# Altium PCB PCB1.PcbDoc
Units mm, origin at the board's own origin, x right, y up, seen from the top; angles counter-clockwise.
Board outline 70 x 50 mm, 4 copper layers (Top Layer, Layer 2, Layer 3, Bottom Layer), stack 1.537 mm thick; 71 components, 52 nets, 290 pads, 108 vias.
Unrouted connection lines stored in the file: 19.
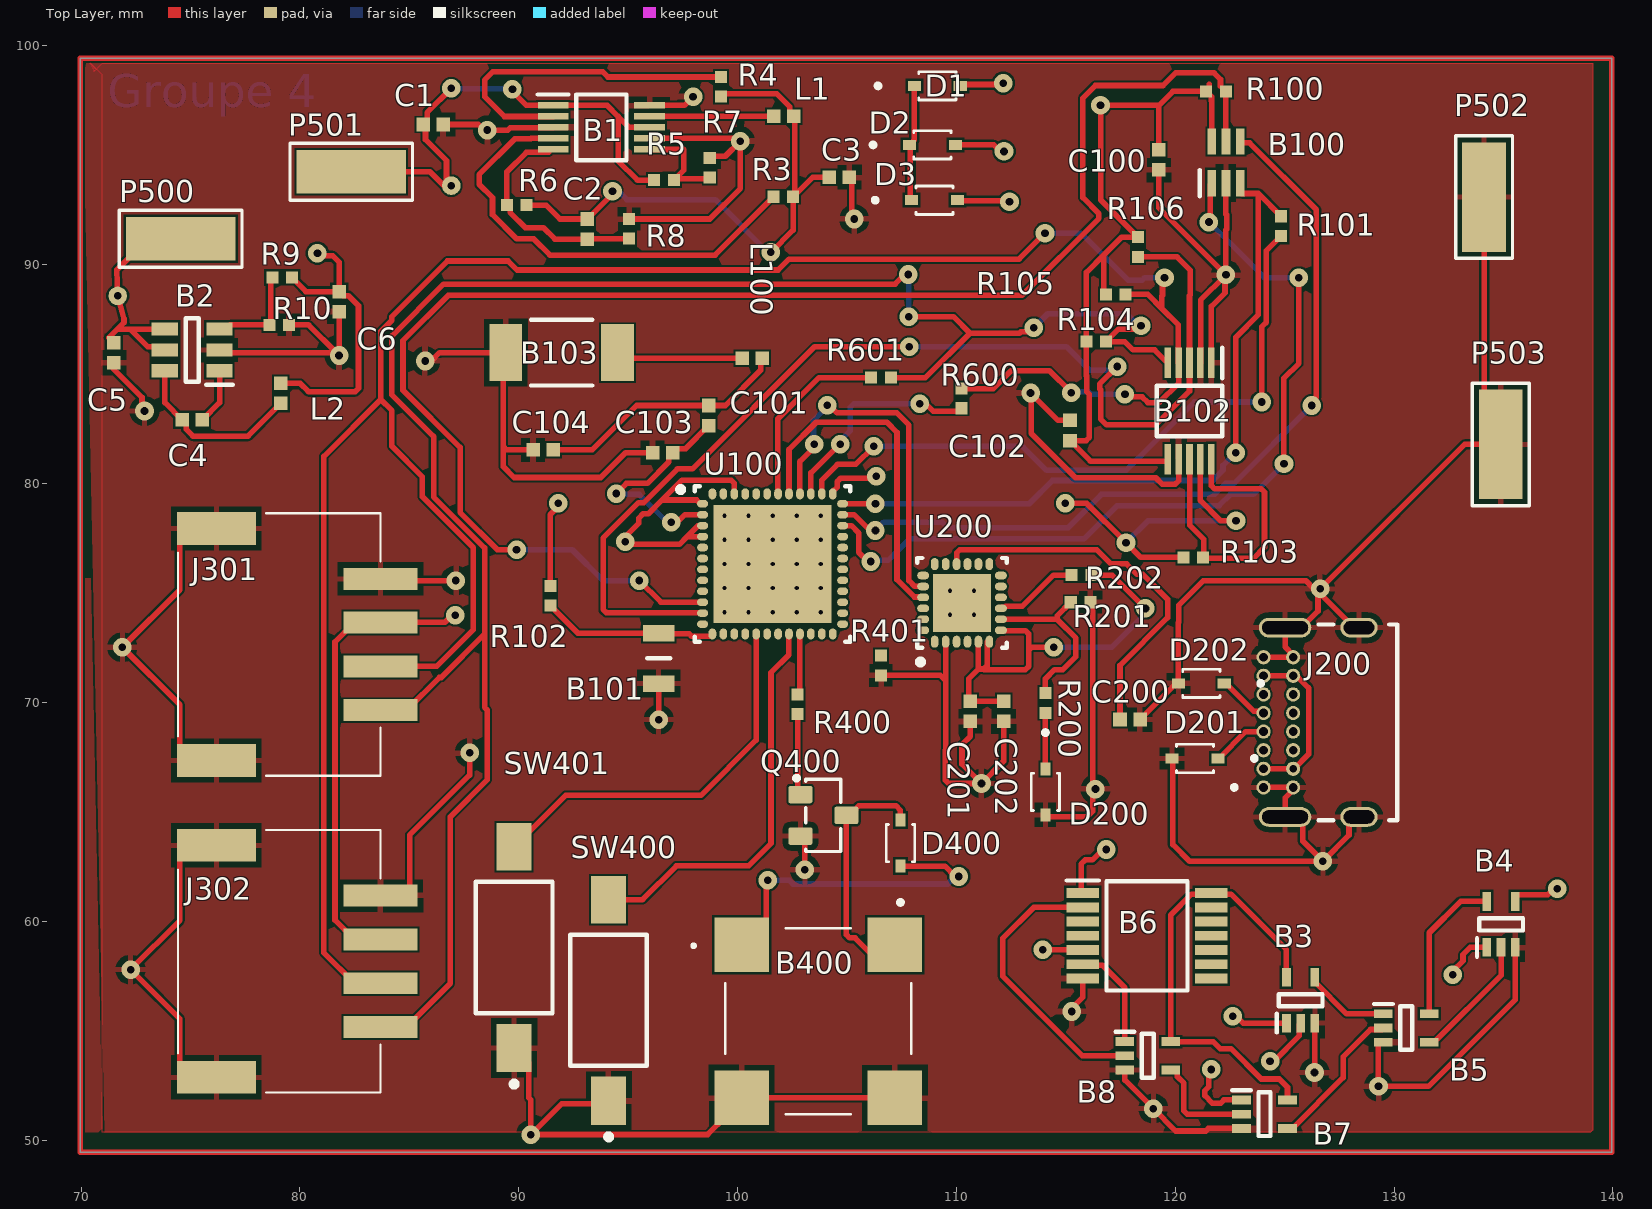
[diagram p0: Top Layer view]
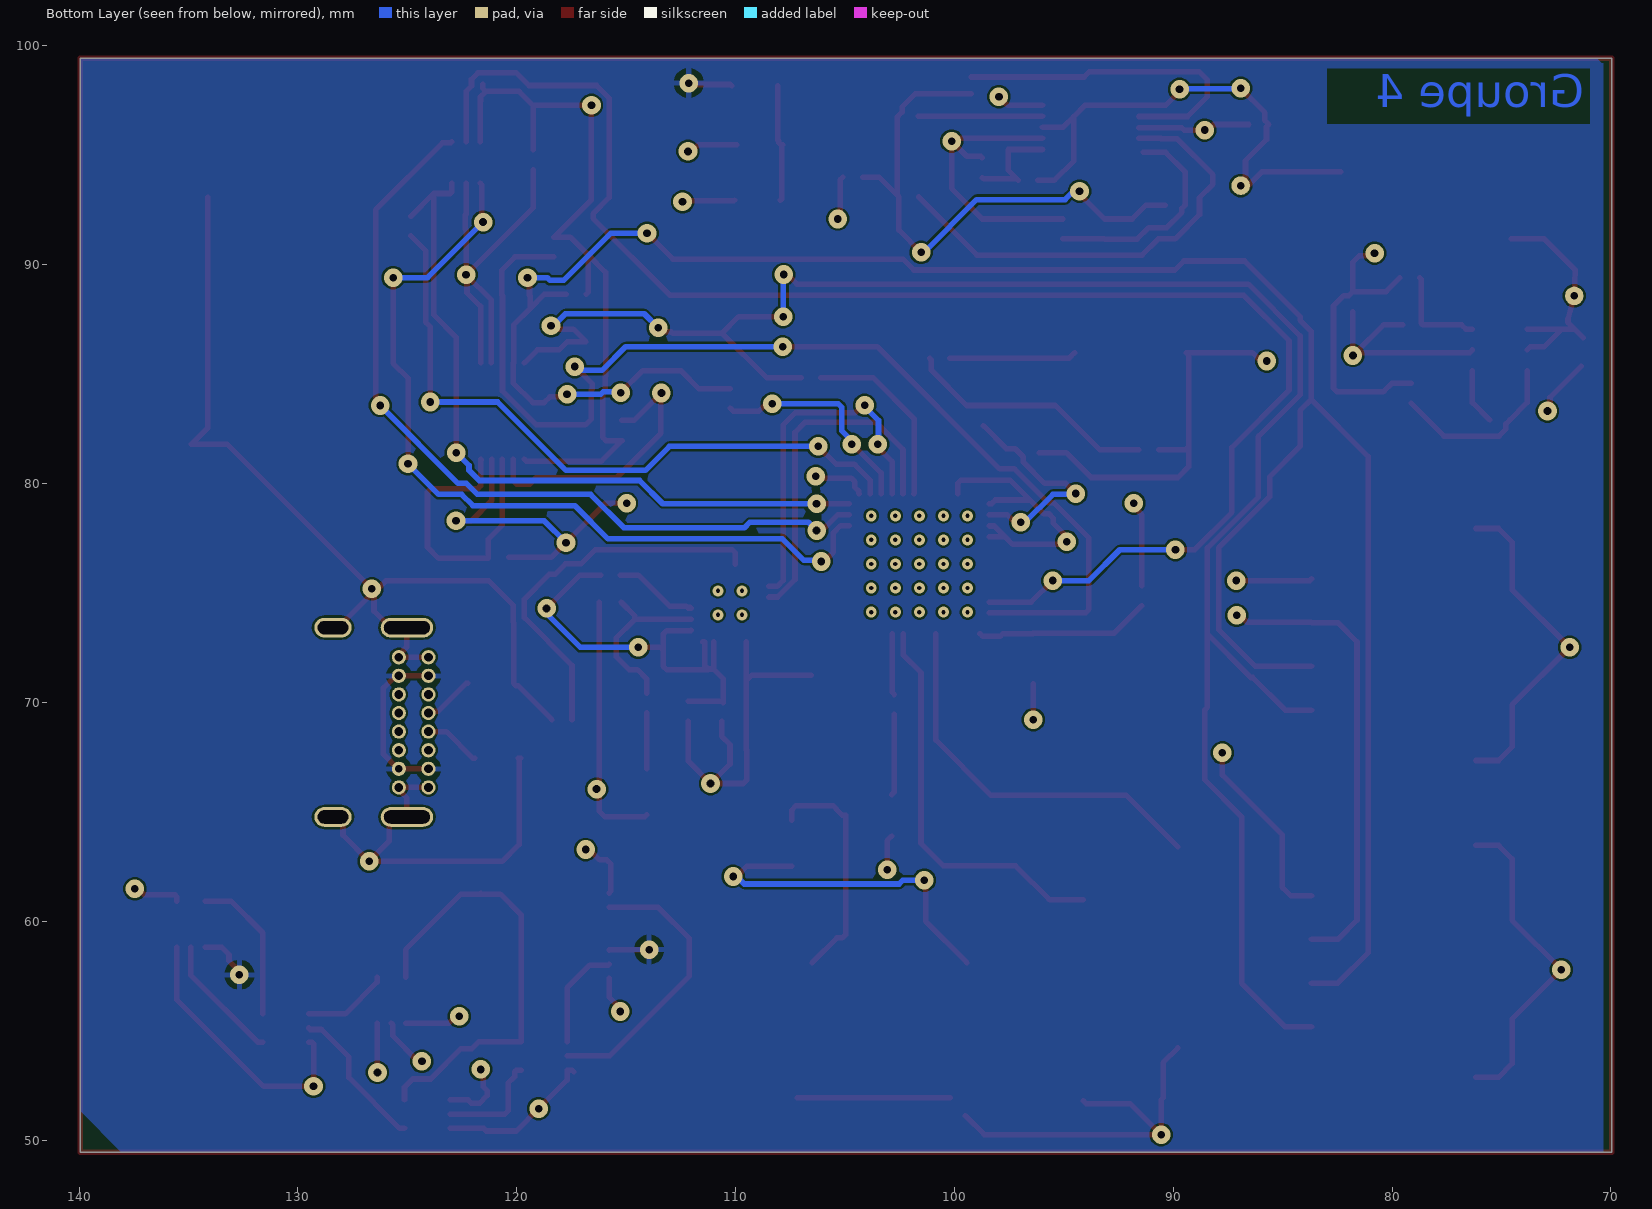
[diagram p1: Bottom Layer view, seen from below]
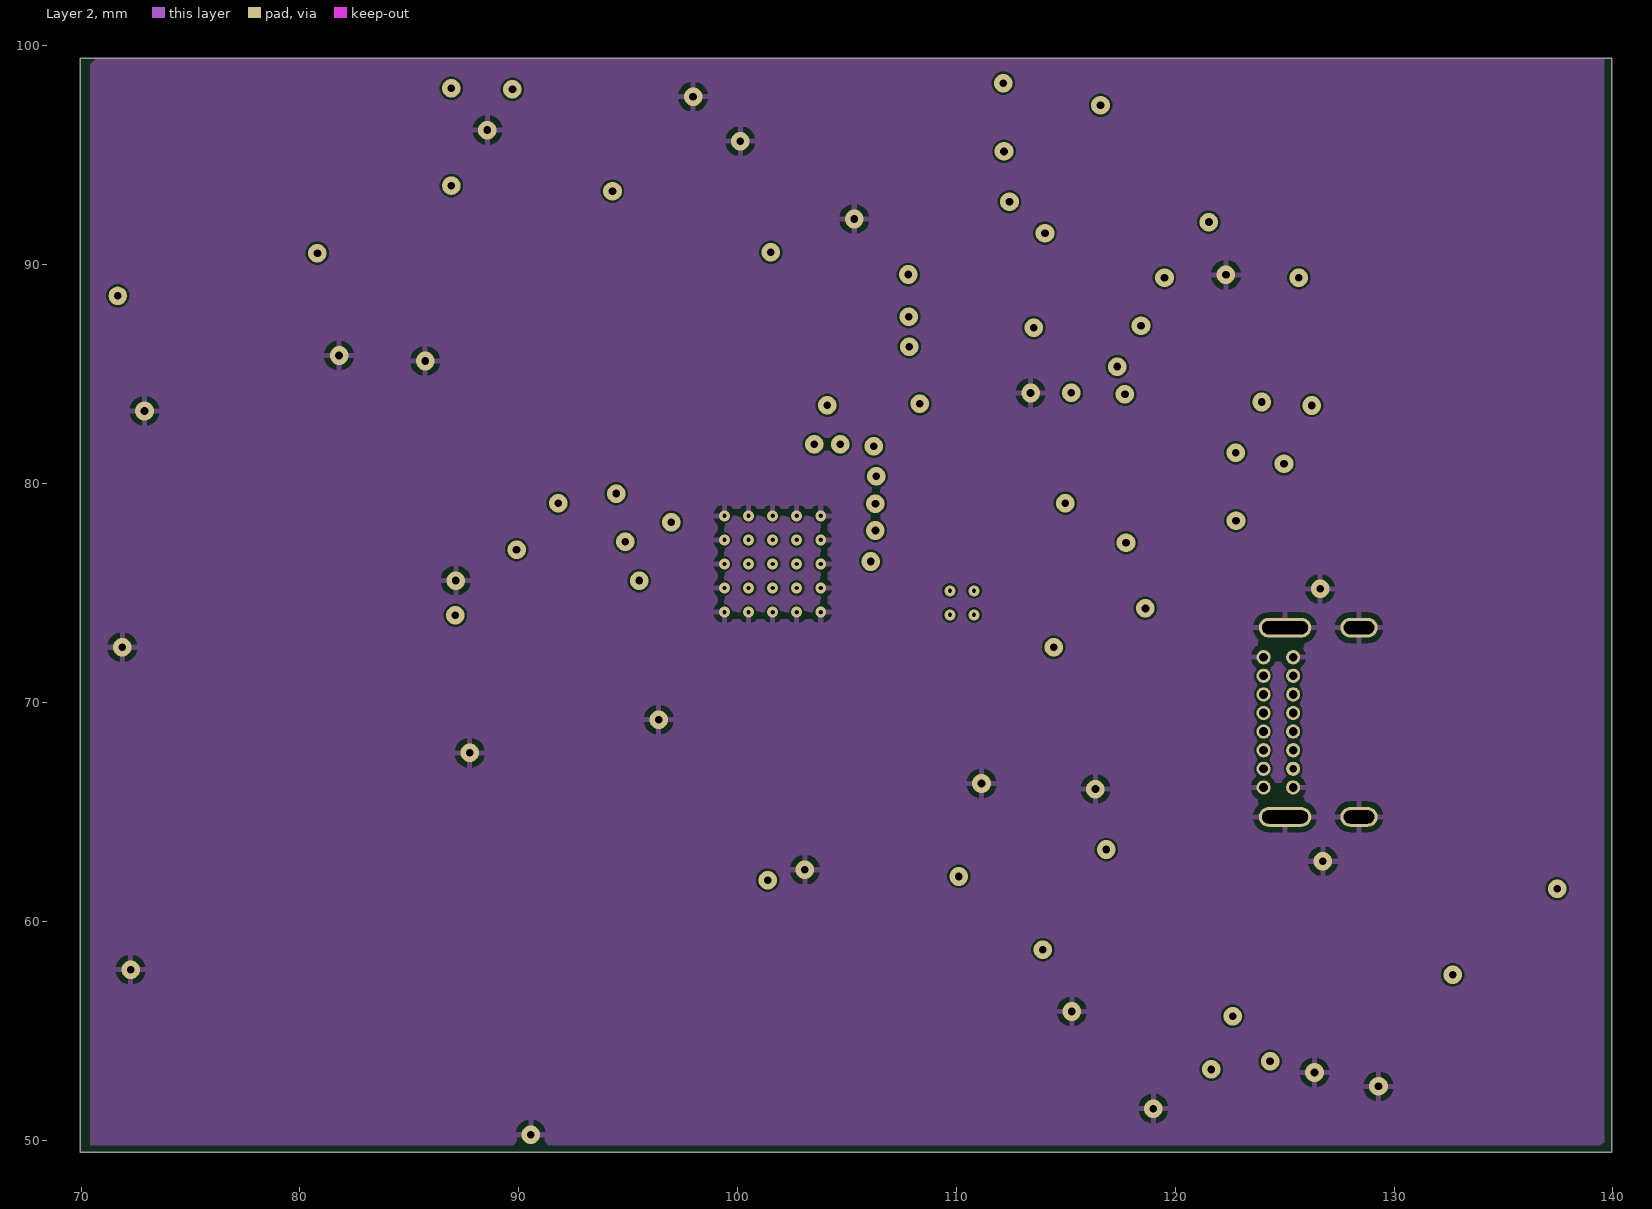
[diagram p2: Layer 2]
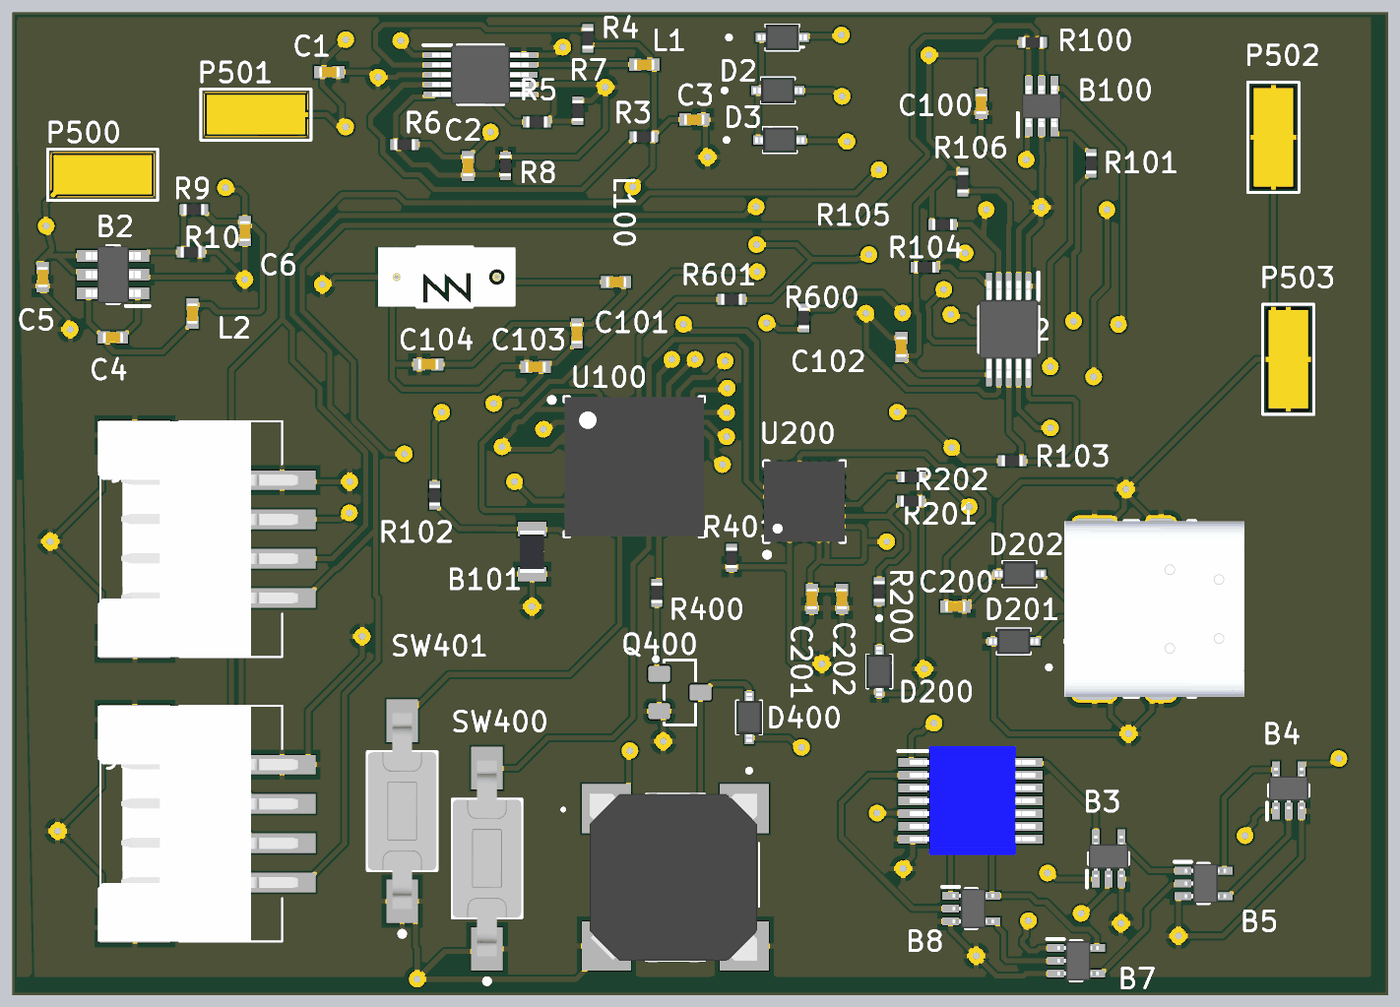
[diagram p3: 3D render of the assembled board from above, using the file's embedded part models]

## Layer stack, top to bottom
Top Solder: solder mask 0.01, SM-001, Dk 3.5
Top Layer: signal copper 0.018
Dielectric 1: prepreg 0.36, FR-4, Dk 4.7
Layer 2: signal copper 0.035
Dielectric 2: core 0.711, FR-4, Dk 4.8
Layer 3: signal copper 0.035
Dielectric 3: prepreg 0.36, FR-4, Dk 4.7
Bottom Layer: signal copper 0.018
Bottom Solder: solder mask 0.01, SM-001, Dk 3.5

## Board outline
69.954,49.441 69.954,99.441 139.954,99.441 139.954,49.441

## Design rules (kind name [scope] priority, off if disabled: settings)
Clearance Clearance_1 [All] p1: gap=0.1 ignorepadtopadclearanceinfootprint=TRUE except(0: Arc-Hole Track-Hole SMDPad-Hole THPad-Hole Via-Hole Fill-Hole Poly-Hole Region-Hole Text-Hole)
ComponentClearance [All] p1: gap=0 collisioncheckmode=3 verticalgap=0 showdistances=FALSE
HoleSize [All] p1: absolutevalues=TRUE maxlimit=0.35 minlimit=0.025 maxpercent=80.000 minpercent=20.000
HoleToHoleClearance [All] p1: gap=0.1 allowstackedmicrovias=TRUE
MinimumSolderMaskSliver [All] p1: minsoldermaskwidth=0
PolygonConnect [All] p1: connectstyle=Relief reliefconductorwidth=0.254 reliefentries=4 polygonreliefangle="90 Angle" airgapwidth=0.254
RoutingVias [All] p1: holewidth=0.35 width=0.85 viastyle="Through Hole" minholewidth=0.35 minwidth=0.85 maxholewidth=0.35 maxwidth=0.85
SilkToSilkClearance [All] p1: silktosilkclearance=0
SilkToSolderMaskClearance [IsPad] p1: minsilkscreentomaskgap=0 clearancetoexposedcopper=TRUE
SolderMaskExpansion [All] p1: expansion=0.05 istentingtop=FALSE
SupplyNets "Schematic Supply Nets_5" [InNet('VIN_MCU')] p1: voltage=0.000
SupplyNets "Schematic Supply Nets_4" [InNet('V_USB')] p2: voltage=0.000
SupplyNets "Schematic Supply Nets_3" [InNet('V_HT_Source')] p3: voltage=0.000
SupplyNets "Schematic Supply Nets_2" [InNet('GND')] p4: voltage=0.000
SupplyNets "Schematic Supply Nets_1" [InNet('V_BT_Source')] p5: voltage=0.000
SupplyNets "Schematic Supply Nets" [InNet('3.3V')] p6: voltage=0.000
Width [All] p1: maxlimit=0.254 minlimit=0.254 preferedwidth=0.254
24 further rules are at their usual default settings.

## Classes and differential pairs
component class IHM: D401
component class connecteurs: J300

## Components (designator, comment, footprint, x,y, rotation, side; value= is the part's Value field where it differs from the comment)
B1 "TPS62056DGSG4" SOP50P490X110-10N 93.774,96.279 r0 top
B2 "LMR50410Y3FQDBVRQ1" SOT95P280X145-6N 75.077,86.106 r180 top
B3 "MC74VHC1GT08DFT2G" SOT65P210X110-5N 125.73,56.388 r90 top
B4 "MC74VHC1GT32DFT1G" SOT65P210X110-5N 134.889,59.851 r90 top
B5 "MC74VHC1GT32DFT1G" SOT65P210X110-5N 130.556,55.118 r0 top
B6 "74VHC05FT" SOP65P640X120-14N 118.708,59.333 r0 top
B7 "MC74VHC1GT08DFT2G" SOT65P210X110-5N 124.079,51.181 r0 top
B8 "MC74VHC1GT08DFT2G" SOT65P210X110-5N 118.745,53.848 r0 top
B100 "TMP126DCKR" SOT65P210X110-6N 122.316,94.676 r90 top
B101 "NB12K00103JBB" RESC2212X50N 96.393,72.009 r90 top
B102 "INA237AIDGST" SOP50P490X110-10N 120.65,83.312 r270 top
B103 "NN01-102" NN01-102 91.958,85.979 r180 top
B400 "CMT-8503-85B-SMT-TR" CMT850385BSMTTR 103.688,55.428 r270 top
C1 "10u" CAPC1005X06N 86.087,96.406 r180 top
C2 "6.8p" CAPC1005X06N 93.139,91.628 r90 top
C3 "22u" CAPC1005X06N 104.648,93.993 r0 top
C4 "0.1u" CAPC1005X06N 75.077,82.905 r0 top
C5 "2.2u" CAPC1005X06N 71.501,85.979 r270 top
C6 "10u" CAPC1005X06N 81.788,88.313 r90 top
C100 "0.1u" CAPC1005X06N 119.253,94.79 r270 top
C101 "0.7pF" CAPC1005X06N 98.679,83.106 r90 top
C102 "100nf" CAPC1005X06N 115.189,82.423 r270 top
C103 "2.8pF" CAPC1005X06N 96.578,81.407 r180 top
C104 "2.2pF" CAPC1005X06N 91.117,81.534 r180 top
C200 "4.7u" CAPC1005X06N 117.935,69.215 r180 top
C201 "1u" CAPC1005X06N 110.637,69.593 r90 top
C202 "0.1u" CAPC1005X06N 112.161,69.593 r90 top
D1 "SD103AWS-7-F" SD103AWS-7-F 109.127,98.171 r0 top (schematic designator DARR1)
D2 "SD103AWS-7-F" SD103AWS-7-F 108.9,95.475 r0 top (schematic designator DARR2)
D3 "SD103AWS-7-F" SD103AWS-7-F 109,92.95 r0 top (schematic designator DARR3)
D200 "SD103AWS-7-F" SD103AWS-7-F 114.066,65.91 r270 top (schematic designator DARR200)
D201 "SD103AWS-7-F" SD103AWS-7-F 120.904,67.437 r180 top (schematic designator DARR201)
D202 "SD103AWS-7-F" SD103AWS-7-F 121.192,70.866 r180 top (schematic designator DARR202)
D400 "SD103AWS-7-F" SD103AWS-7-F 107.442,63.567 r90 top (schematic designator DARR400)
J200 "Use" USB4085-GF-A 128.397,69.088 r90 top
J301 "114020164" 114020164 79.883,72.644 r270 top
J302 "114020164" 114020164 79.883,58.166 r270 top
L1 "10u" LQPC1005X06N 104.902,99.581 r0 top
L2 "3.3u" LQPC1005X06N 76.327,86.916 r90 top
L100 "2.4nH" LQPC1005X06N 97.879,82.931 r180 top
P500 "Plage CMS 10x5" "Plage CMS 10x5" 74.549,91.186 r180 top
P501 "Plage CMS 10x5" "Plage CMS 10x5" 82.344,94.247 r180 top
P502 "Plage CMS 10x5" "Plage CMS 10x5" 134.112,93.091 r90 top
P503 "Plage CMS 10x5" "Plage CMS 10x5" 134.874,81.788 r90 top
Q400 "SS8050-G" SS8050-G 103.92,64.836 r270 top
R3 "1M" RESC1005X06N 102.087,93.104 r0 top
R4 "1M" RESC1005X06N 99.235,98.126 r270 top
R5 "130k" RESC1005X06N 96.637,93.866 r180 top
R6 "820k" RESC1005X06N 89.906,92.723 r0 top
R7 "100k" RESC1005X06N 98.727,94.432 r270 top
R8 "91k" RESC1005X06N 95.044,91.638 r270 top
R9 "51k" RESC1005X06N 79.19,89.408 r0 top
R10 "22.1k" RESC1005X06N 79.052,87.249 r180 top
R100 "10k" RESC1005X06N 121.862,97.917 r180 top
R101 "10k" RESC1005X06N 124.841,91.763 r90 top
R102 "10k" RESC1005X06N 91.44,74.872 r270 top
R103 "10k" RESC1005X06N 120.825,76.625 r0 top
R104 "10k" RESC1005X06N 116.39,86.487 r0 top
R105 "10k" RESC1005X06N 117.279,88.646 r0 top
R106 "10k" RESC1005X06N 118.306,90.805 r270 top
R200 "24K" RESC1005X06N 114.066,69.974 r270 top
R201 "47K" RESC1005X06N 115.675,74.575 r180 top
R202 "4.7K" RESC1005X06N 115.717,75.816 r0 top
R400 "180" RESC1005X06N 102.743,69.908 r270 top
R401 "150 ohm" RESC1005X06N 106.553,71.686 r90 top
R600 "2.4K" RESC1005X06N 110.236,83.889 r90 top
R601 "2.4K" RESC1005X06N 106.553,84.836 r0 top
SW400 "FSMSM" TECO-FSMSM-2_V 94.107,56.388 r90 top
SW401 "FSMSM" TECO-FSMSM-2_V 89.789,58.801 r90 top
U100 "ESP32-PICO-D4" PQFN50P700X700X104_HS-49N 101.6,76.325 r0 top
U200 "CP2104-F03-GM" PQFN50P400X400X80_HS-25N 110.256,74.546 r90 top

## Footprints (in the part's own frame and the unit in brackets; to place one, negate y for a bottom-side part, rotate by r counter-clockwise, add the part's x,y. Pads: shape width x height; smd on the part's side, far side on the other; paste and mask are expansions set on the pad)
114020164 [mm]
  rect 1x3.4 smd: 1(-3,3.8) 2(-1,3.8) 3(1,3.8) 4(3,3.8)
  rect 1.5x3.6 smd: MP1(-5.3,-3.7) MP2(5.3,-3.7)
  silkscreen extent -6,-5.45 6,3.8, body extent -6,-5.59 6,4.6, height 5.2
CAPC1005X06N [mm] "Chip Capacitor, 2-Leads, Body 1,00x0,50mm, IPC Medium Density"
  rect 0.62x0.62 smd: 1(-0.46,0) 2(0.46,0)
  body extent -0.53,-0.28 0.53,0.28, height 0.55
CMT850385BSMTTR [mm]
  rect 2.5x2.5 smd: 1(-3.5,-3.5) 4(-3.5,3.5) MP1(3.5,-3.5) MP2(3.5,3.5)
  silkscreen extent -4.25,-5.75 4.25,4.25, body extent -4.31,-4.35 4.31,4.15, height 3
LQPC1005X06N [mm]
  rect 0.62x0.62 smd: 1(-3.254,-2.794) 2(-2.334,-2.794)
  body extent -3.32,-3.07 -2.27,-2.52, height 0.55
NN01-102 [mm] "Antennes Compact Reach Xtend 2.4 GHz"
  rect 1.5x2.6 smd: 1(-2.55,0) 2(2.55,0)
  silkscreen extent -1.4,-1.5 1.4,1.5, body extent -3.6,-1.5 3.4,1.5, height 2.2
"Plage CMS 10x5" [mm] "Plage CMS 10x5"
  rect 5x2 smd paste-1 mask+0.15: 1(0,0)
  silkscreen extent -2.8,-1.3 2.8,1.3
PQFN50P400X400X80_HS-25N [mm] "PQFN, 24-Leads, Body 4,00x4,00mm, Pitch 0,50mm, Thermal Pad 2,65x2,65mm, IPC Medium Density"
  oval 0.55x0.35 smd: 1(-1.775,1.25) 2(-1.775,0.75) 3(-1.775,0.25) 4(-1.775,-0.25) 5(-1.775,-0.75) 6(-1.775,-1.25) 13(1.775,-1.25) 14(1.775,-0.75) 15(1.775,-0.25) 16(1.775,0.25) 17(1.775,0.75) 18(1.775,1.25)
  oval 0.35x0.55 smd: 7(-1.25,-1.775) 8(-0.75,-1.775) 9(-0.25,-1.775) 10(0.25,-1.775) 11(0.75,-1.775) 12(1.25,-1.775) 19(1.25,1.775) 20(0.75,1.775) 21(0.25,1.775) 22(-0.25,1.775) 23(-0.75,1.775) 24(-1.25,1.775)
  rect 2.65x2.65 smd: 25(0,0)
  silkscreen extent -2.82,-2.05 2.05,2.05, body extent -2.05,-2.05 2.05,2.05, height 0.8
PQFN50P700X700X104_HS-49N [mm] "PQFN, 48-Leads, Body 7,00x7,00mm, Pitch 0,50mm, Thermal Pad 5,40x5,40mm, IPC Medium Density"
  oval 0.5x0.35 smd: 1(-3.2,2.75) 2(-3.2,2.25) 3(-3.2,1.75) 4(-3.2,1.25) 5(-3.2,0.75) 6(-3.2,0.25) 7(-3.2,-0.25) 8(-3.2,-0.75) 9(-3.2,-1.25) 10(-3.2,-1.75) 11(-3.2,-2.25) 12(-3.2,-2.75) 25(3.2,-2.75) 26(3.2,-2.25) 27(3.2,-1.75) 28(3.2,-1.25) 29(3.2,-0.75) 30(3.2,-0.25) 31(3.2,0.25) 32(3.2,0.75) 33(3.2,1.25) 34(3.2,1.75) 35(3.2,2.25) 36(3.2,2.75)
  oval 0.35x0.5 smd: 13(-2.75,-3.2) 14(-2.25,-3.2) 15(-1.75,-3.2) 16(-1.25,-3.2) 17(-0.75,-3.2) 18(-0.25,-3.2) 19(0.25,-3.2) 20(0.75,-3.2) 21(1.25,-3.2) 22(1.75,-3.2) 23(2.25,-3.2) 24(2.75,-3.2) 37(2.75,3.2) 38(2.25,3.2) 39(1.75,3.2) 40(1.25,3.2) 41(0.75,3.2) 42(0.25,3.2) 43(-0.25,3.2) 44(-0.75,3.2) 45(-1.25,3.2) 46(-1.75,3.2) 47(-2.25,3.2) 48(-2.75,3.2)
  rect 5.4x5.4 smd: 49(0,0)
  silkscreen extent -4.32,-3.55 3.55,3.55, body extent -3.55,-3.55 3.55,3.55, height 1.04
RESC1005X06N [mm] "Chip Resistor, 2-Leads, Body 1,00x0,50mm, IPC Medium Density"
  rect 0.55x0.55 smd: 1(-0.45,0) 2(0.45,0)
  body extent -0.53,-0.28 0.53,0.28, height 0.55
RESC2212X50N [mm]
  rect 0.75x1.45 smd: 1(-1.15,0) 2(1.15,0)
  silkscreen extent 0,-0.53 0,0.53, body extent -1.07,-0.63 1.07,0.63, height 0.5
SD103AWS-7-F [mm]
  rect 0.6x0.46 smd: 1(-1.05,0) 2(1.05,0)
  silkscreen extent -2.81,-0.65 0.85,0.65, body extent -1.25,-0.65 1.25,0.65, height 1.2
SOP50P490X110-10N [mm]
  rect 1.4x0.3 smd: 1(-2.2,1) 2(-2.2,0.5) 3(-2.2,0) 4(-2.2,-0.5) 5(-2.2,-1) 6(2.2,-1) 7(2.2,-0.5) 8(2.2,0) 9(2.2,0.5) 10(2.2,1)
  silkscreen extent -2.9,-1.5 1.15,1.5, body extent -2.46,-1.5 2.46,1.5, height 1.06
SOP65P640X120-14N [mm]
  rect 1.475x0.45 smd: 1(-2.938,1.95) 2(-2.938,1.3) 3(-2.938,0.65) 4(-2.938,0) 5(-2.938,-0.65) 6(-2.938,-1.3) 7(-2.938,-1.95) 8(2.938,-1.95) 9(2.938,-1.3) 10(2.938,-0.65) 11(2.938,0) 12(2.938,0.65) 13(2.938,1.3) 14(2.938,1.95)
  silkscreen extent -3.67,-2.5 1.85,2.52, body extent -3.1,-2.75 3.3,2.75, height 1.1
SOT65P210X110-5N [mm]
  rect 0.85x0.4 smd: 1(-1.05,0.65) 2(-1.05,0) 3(-1.05,-0.65) 4(1.05,-0.65) 5(1.05,0.65)
  silkscreen extent -1.48,-1 0.28,1.1, body extent -0.95,-1 1.15,1, height 1.1
SOT65P210X110-6N [mm]
  rect 1.2x0.4 smd: 1(-0.95,0.65) 2(-0.95,0) 3(-0.95,-0.65) 4(0.95,-0.65) 5(0.95,0) 6(0.95,0.65)
  silkscreen extent -1.55,1.2 -0.35,1.2, body extent -1.05,-1 1.05,1, height 1
SOT95P280X145-6N [mm]
  rect 1.2x0.6 smd: 1(-1.25,0.95) 2(-1.25,0) 3(-1.25,-0.95) 4(1.25,-0.95) 5(1.25,0) 6(1.25,0.95)
  silkscreen extent -1.85,-1.45 0.3,1.6, body extent -1.4,-1.45 1.4,1.45, height 1.2
SS8050-G [mm]
  rrect25% 0.8x1.1 smd paste+0 mask+0.075: 1(-0.95,-1.05) 2(0.95,-1.05) 3(0,1.05)
  silkscreen extent -1.77,-1.3 1.65,0.8, body extent -1.5,-1.3 1.5,1.3, height 1.1
TECO-FSMSM-2_V [mm] "SMD, 2-Leads, Body 6x3.5mm, Pitch 9.19mm"
  rect 2.2x1.6 smd: 1(-4.595,0)
  rect 2.18x1.6 smd: 2(4.595,0)
  silkscreen extent -6.37,-1.75 3,1.75, body extent -4.98,-1.75 4.98,1.75, height 4.4
USB4085-GF-A [mm]
  round 0.65 hole 0.4: A1(-2.975,4.36) A4(-2.125,4.36) A5(-1.275,4.36) A6(-0.425,4.36) A7(0.425,4.36) A8(1.275,4.36) A9(2.125,4.36) A12(2.975,4.36) B1(2.975,3.01) B4(2.125,3.01) B5(1.275,3.01) B6(0.425,3.01) B7(-0.425,3.01) B8(-1.275,3.01) B12(-2.975,3.01)
  round 0.65 hole 0.35: B9(-2.125,3.01)
  oval 0.9x1.7 hole 0.6 slot 1.4 at 90 deg: S1(-4.325,0) S2(4.325,0)
  oval 0.9x2.4 hole 0.6 slot 2.1 at 90 deg: S3(-4.325,3.38) S4(4.325,3.38)
  silkscreen extent -4.47,-1.74 4.47,5.8, body extent -4.47,-4.25 4.47,4.92, height 3.46

## Part data
B1: "TEXAS INSTRUMENTS - TPS62056DGSG4 - Synchronous Buck (Step Down) Switching Regulator, Fixed, 2.7V-10Vin, 3.3V/0.8A out, 850kHz, VSSOP-10", Manufacturer_Name="Texas Instruments", Mouser Part Number=595-TPS62056DGSG4, Manufacturer_Part_Number=TPS62056DGSG4
B2: "Régulateurs de tension de commutation Automotive qualified SIMPLE SWITCHER 4-V to 36-V, 1-A synchronous step-down converter 6-SOT-23 -40 to 150", Manufacturer_Name="Texas Instruments", Mouser Part Number=595-R50410Y3FQDBVRQ1, Manufacturer_Part_Number=LMR50410Y3FQDBVRQ1
B3 B7 B8: "Single 2-Input AND Gate, TTL Level", Manufacturer_Name=onsemi, Manufacturer_Part_Number=MC74VHC1GT08DFT2G
B4 B5: "Single 2-Input OR Gate, TTL Level", Manufacturer_Name=onsemi, Mouser Part Number=863-C74VHC1GT32DFT1G, Manufacturer_Part_Number=MC74VHC1GT32DFT1G
B6: "Logic Gates CMOS LOGIC IC INVERTER", Manufacturer_Name=Toshiba, Mouser Part Number=757-74VHC05FT, Manufacturer_Part_Number=74VHC05FT
B100: "Board Mount Temperature Sensors +/-0.25 C SPI temperature sensor with 175 C operation, CRC and slew-rate alert", Manufacturer_Name="Texas Instruments", Mouser Part Number=595-TMP126DCKR, Manufacturer_Part_Number=TMP126DCKR
B101: "NTC SMD Thermistor, NB12K, 10K, 5% AVX 10k 0805 Protection NTC Thermistor, 5s, 2 x 1.25 x 1.3mm", Manufacturer_Name="Kyocera AVX", Mouser Part Number=581-NB12K00103JBB, Arrow Part Number=NB12K00103JBB, Arrow Price/Stock=https://www.arrow.com/en/products/nb12k00103jbb/avx, Datasheet Link=https://datasheet.datasheetarchive.com/originals/distributors/Datasheets-DGA6/551314.pdf, Geometry.Height=0.5mm, Manufacturer_Part_Number=NB12K00103JBB, Mouser Price/Stock=https://www.mouser.co.uk/ProductDetail/AVX/NB12K00103JBB/?qs=4%252B6%252BTdINQeDPvI%252BQUQjJ3Q%3D%3D
B102: "Current Sense Amplifiers 85-V, 16-bit, I2C output current/voltage/power monitor with alert 10-VSSOP -40 to 125", Manufacturer_Name="Texas Instruments", Mouser Part Number=595-INA237AIDGST, Manufacturer_Part_Number=INA237AIDGST
B103: "Antennes Compact Reach Xtend 2.4 GHz"
B400: "Speakers & Transducers buzzer, 8.5 mm, 3 mm deep, M, 3.6 V, 85 dB, Surface Mount (SMT), Audio Transducer", Manufacturer_Name="Same Sky", Mouser Part Number=490-CMT-850385BSMTTR, Manufacturer_Part_Number=CMT-8503-85B-SMT-TR
C1 C2 C3 C4 C5 C6 C100 C101 C102 C103 C104 C200 C201 C202: library part Capacitor
D1 D2 D3 D200 D201 D202 D400: "Diode Array 3 Independent Schottky 40V 175mA Surface Mount 6-TSSOP, SC-88, SOT-363"
J200: library part USB4085-GF-A, "Connecteurs USB USB Type C, 2.0, Rec, TH , G/F, RA , Top Mnt, T & R"
J301 J302: "Seeed Studio Accessories Grove Female Header - SMD-4P-2.0mm-90D-20Pcs", Manufacturer_Name="Seeed Studio", Mouser Part Number=713-114020164, Manufacturer_Part_Number=114020164
L1 L2 L100: library part Bobine
P500 P501 P502 P503: "Plage de report CMS 10x5mm", Footprint_statut=ok, PN=L30
Q400: "Bipolar Transistors - BJT NPN TRANSISTOR 1.5A 40V"
R3 R4 R5 R6 R7 R8 R9 R10 R100 R101 R102 R103 R104 R105 R106 R200 R201 R202 R400 R401 R600 R601: library part Resistor
SW400 SW401: library part CMP-2000-07511-1, "FSMSM Push Button Switch, 50 mA, -35 to 85 degC, 2-Pin SMD, RoHS, Bulk", Case\/Package=SMD/SMT, Contact Current Rating=50mA, Contact Resistance=100mOhm, Manufacturer="TE Connectivity", Max Operating Temperature=85degC, Max Voltage Rating (DC)=12V, Min Operating Temperature=-35degC, Operating Force=180gf, Package Description="2-Pin Surface Mount Device, Body 6 x 3.5 mm, Pitch 9.19 mm", Package Quantity=1000, Voltage Rating (DC)=24V, Actuator Length=1.07mm, Actuator Material=Polyamide, Contact Material=Brass, Contact Plating=Silver, Current Rating=50mA, Datasheet URL=http://www.te.com/commerce/DocumentDelivery/DDEController?Action=showdoc&DocId=Customer+Drawing%7F1437566-3%7FC2%7Fpdf%7FEnglish%7FENG_CD_1437566-3_C2_1437566_3_1_c.dwg.pdf%7F1437566-3, Datasheet Version="Rev. C2, 08/2014", Electrical Life=20000Cycles, ELV=Compliant, Illumination Type=Illuminated, Lead Free=LeadFree, Manufacturer URL=http://www.te.com/, Mechanical Life=20000Cycles, Mount=SurfaceMount, Mounting Technology=SurfaceMount, Orientation=Straight, Package Reference=FSMSM, Packaging=LoosePiece, REACH SVHC=Unknown, RoHSCompliant=true, Switch Travel=0.25mm, Termination=GullWing, Throw Configuration=SPST
U100: library part ESP32, "Système RF sur puce - SoC SIP module ESP32 with 4MByte Flash, Dual Core MCU, Wi-Fi & Bluetooth Combo, LGA48-pin, 7*7mm", Manufacturer 1="Espressif Systems", Supplier Part Number 1=1904-1029-1-ND, Manufacturer Part Number 1=ESP32-PICO-D4, Supplier 1=Digi-Key
U200: library part USBBridge, "USB Bridge, USB to UART USB 2.0 UART Interface 24-QFN (4x4)", Manufacturer 1="Silicon Labs", Manufacturer Part Number 1=CP2104-F03-GM, Supplier 1="Arrow Electronics", Supplier Part Number 1=CP2104-F03-GM

## Free pads (board coordinates)
  round 0.85 hole 0.35: 2(71.675,88.575) 3(86.916,93.612)

## Via types
v1: diameter 0.85, hole 0.35, Top Layer to Bottom Layer, 79 vias
v2: diameter 0.5, hole 0.2, Top Layer to Bottom Layer, 29 vias

## Nets (pads, with @x,y where several pads share a name; then routed paths per layer and width w, separated by ;. In a path a pad name is that pad's centre, name@x,y a point inside that pad or via, vN(x,y) a via of type N, cw(c..) or ccw(c..) an arc to the next point about the centre after c; other vN are vias at no path point)
3.3V: C201.2 C202.2 R202.2 U200.5 U200.6 U200.7 | length 20.5
  Top Layer w0.254: C201.2@110.558,69.974 C201.2 C202.2 ; C201.2@110.558,70.053 110.558,71.076 111.006,71.524 ; U200.5 111.006,71.524 ; U200.6 111.503,72.768 111.421,72.768 111.399,72.746 111.399,71.673 111.25,71.524 ; U200.7 112.051,73.276 113.155,73.276 113.304,73.127 113.304,72.387 ; v1(114.447,72.514) 113.431,72.514 113.304,72.387 ; R202.2 117.114,75.816 v1(118.638,74.292) ; 111.006,71.524 111.25,71.524 ; 111.25,71.524 111.277,71.498 113.155,71.498 113.304,71.647 113.304,72.387
  Bottom Layer w0.254: v1(114.447,72.514) 117.092,72.514 118.638,74.06 v1(118.638,74.292)
D+: D201.1 J200.A6 U200.3 | length 2.6
  Top Layer w0.254: D201.1@121.92,67.437 121.99,67.437 123.216,68.663 J200.A6
D-: D202.1 J200.A7 U200.4 | length 2.4
  Top Layer w0.254: D202.1 122.312,70.866 123.589,69.589 123.961,69.589 J200.A7
FB: B1.5 B2.3 C2.1 R6.1 R8.2 R9.1 R10.2 | length 14.7
  Top Layer w0.254: B2.3 76.627,87.056 76.82,87.249 R10.2 78.671,87.318 78.671,89.339 R9.1 ; B1.5@91.361,95.136 90.345,95.136 89.456,94.247 R6.1 89.604,92.575 89.604,92.387 90.297,91.694 91.121,91.694 91.646,91.168 C2.1 93.149,91.178 95.034,91.178 R8.2
GND: B1.3 B1.7 B1.10 B2.2 B3.3 B4.3 B5.3 B6.7 B7.3 B8.3 B100.2 B101.1 B102.1 B102.2 B102.7 B103.2 B400.MP1 B400.MP2 C1.1 C3.2 C5.2 C6.1 C100.2 C102.1 C103.2 C104.2 C200.1 C201.1 C202.1 D200.2 D201.2 D202.2 J200.A1 J200.A12 J200.B1 J200.B12 J200.S1 J200.S2 J200.S3 J200.S4 J301.1 J301.MP1 J301.MP2 J302.1 J302.MP1 J302.MP2 P502.1 P503.1 Q400.2 R7.1 R8.1 R10.1 R201.1 R401.1 SW400.1 SW401.1 U100.49 U200.2 | length 273.4
  Top Layer w0.254: C5.2@71.35,85.368 72.784,83.934 72.784,83.426 v1(72.898,83.312) ; J302.MP2 75.133,52.866 74.51,53.489 74.51,55.538 v1(72.263,57.785) 74.51,60.032 74.51,62.843 75.133,63.466 J302.MP1 ; J301.MP2 75.133,67.344 74.51,67.967 74.51,69.889 v1(71.882,72.517) 74.51,75.145 74.51,77.321 75.133,77.944 J301.MP1 ; B2.2 76.454,85.979 v1@81.661,85.979 ; R10.1 80.391,87.249 v1@81.661,85.979 ; C6.1 v1(81.788,85.852) v1@81.661,85.979 ; J302.1 84.639,61.166 85.012,61.539 85.012,63.93 87.757,66.675 v1(87.757,67.691) ; J301.1 83.762,75.565 v1(87.122,75.565) ; v1(85.725,85.598) 86,85.598 86.381,85.979 B103.2 ; C1.1 88.152,96.406 88.406,96.152 v1(88.567,96.152) 89.503,96.152 89.614,96.263 B1.3@91.574,96.263 ; B103.2@89.291,85.862 89.291,81.683 ; SW401.1 90.462,53.533 90.462,51.922 90.551,51.833 v1(90.551,50.247) ; C104.2 89.44,81.534 89.291,81.683 ; SW400.1 93.98,51.666 91.97,51.666 v1(90.551,50.247) ; R8.1 98.727,92.088 100.124,93.485 v1(100.124,95.644) ; B1.7 99.989,95.779 v1(100.124,95.644) ; B1.10 97.568,97.279 v1(97.965,97.676) ; C103.2 94.879,81.407 93.747,80.275 89.788,80.275 89.291,80.772 89.291,81.683 ; v1(96.393,69.208) B101.1 ; R7.1 98.8,94.955 99.435,94.955 v1(100.124,95.644) ; B400.MP1@99.497,51.11 98.634,50.247 v1(90.551,50.247) ; B400.MP1 B400.MP2 ; Q400.2 103.075,63.681 v1(103.075,62.35) ; C3.2 105.22,93.882 105.22,92.2 v1(105.331,92.088) ; R401.1 109.263,71.236 109.506,70.993 ; U200.2 109.506,70.993 ; C201.1 110.637,68.45 110.256,68.069 110.256,67.18 v1(111.145,66.291) ; C202.1 112.161,67.307 v1(111.145,66.291) ; v1(113.388,84.138) v1@113.411,84.115 ; D200.2 114.159,64.767 115.971,64.767 116.225,65.021 116.225,65.91 v1(116.352,66.037) 116.231,66.158 R201.1@116.231,74.575 ; C102.1 114.643,82.883 v1@113.411,84.115 ; v1(115.275,55.875) 115.275,56.025 115.77,56.52 B6.7 ; B8.3@117.397,53.125 117.47,53.198 B8.3 117.695,52.739 v1(118.999,51.435) 120.021,50.413 121.398,50.413 121.515,50.531 B7.3 ; C200.1 119.943,70.763 120.039,70.763 D202.2 120.142,73.641 120.162,73.661 120.162,74.442 121.285,75.565 125.963,75.565 126.344,75.184 v1@126.522,75.184 ; C100.2 119.253,92.598 v1(122.316,89.535) ; D201.2@119.82,67.437 119.888,67.369 119.888,63.5 120.65,62.738 v1(126.746,62.738) ; D201.2 D201.2@119.924,67.437 ; B102.7 120.15,80.123 120.001,79.974 119.399,79.974 119.109,80.264 115.443,80.264 113.411,82.296 v1@113.411,84.115 ; B102.2@121.158,85.512 121.158,88.377 v1@122.272,89.491 ; B102.1 121.65,88.092 122.272,88.714 v1@122.272,89.491 ; B100.2 122.316,92.311 122.345,92.282 122.345,91.614 122.316,91.585 v1(122.316,89.535) ; J200.A1 J200.B12 125.387,66.006 125.017,65.636 J200.S3 125.529,64.763 125.827,64.465 125.827,63.657 v1(126.746,62.738) ; J200.A12 J200.B1 125.387,72.17 125.017,72.54 J200.S4 125.767,73.413 126.522,74.168 v1@126.522,74.966 ; v1@126.38,53.086 B3.3 ; J200.S1 128.238,64.763 127.94,64.465 127.94,63.932 v1(126.746,62.738) ; J200.S2 128.172,73.413 126.619,74.966 v1(126.619,75.184) 133.223,81.788 P503.1 134.112,82.55 P502.1 ; B5.3 129.359,54.468 129.286,54.395 v1(129.286,52.451) 131.572,52.451 135.539,56.418 B4.3 ; 109.506,70.993 109.506,67.827 109.494,67.815 109.494,66.44 109.643,66.291 v1(111.145,66.291) ; v1@122.272,89.491 v1(122.316,89.535)
  other v1: 126.365,53.086
  other v2: 99.4,74.125 100.5,74.125 101.6,74.125 102.7,74.125 103.8,74.125 99.4,75.225 100.5,75.225 101.6,75.225 102.7,75.225 103.8,75.225 99.4,76.325 100.5,76.325 101.6,76.325 102.7,76.325 103.8,76.325 99.4,77.425 100.5,77.425 101.6,77.425 102.7,77.425 103.8,77.425 99.4,78.525 100.5,78.525 101.6,78.525 102.7,78.525 103.8,78.525
LBO: B1.2 R4.1 | length 15.3
  Top Layer w0.254: B1.2@91.574,96.771 89.345,96.771 88.44,97.676 88.44,98.438 88.821,98.819 93.833,98.819 94.076,98.576 R4.1
NetB1_6: B1.6 R5.1 R7.2 | length 4.7
  Top Layer w0.254: B1.6@95.974,95.263 97.53,95.263 97.53,94.309 R5.1@97.145,93.924 ; R5.1 R5.1@97.145,93.924 ; R7.2 98.669,93.924 R5.1@97.145,93.924
NetB2_1: B2.1 C4.2 | length 2.6
  Top Layer w0.254: C4.2 76.327,83.695 B2.1
NetB2_6: B2.6 C4.1 L2.1 | length 8.1
  Top Layer w0.254: B2.6 73.827,83.695 C4.1 74.8,82.722 74.8,82.483 75.114,82.169 77.628,82.169 L2.1
NetB3_4: B3.4 B5.1 | length 3.9
  Top Layer w0.254: B3.4 126.38,57.213 127.825,55.768 B5.1
NetB4_2: B4.2 B5.4 | length 5.8
  Top Layer w0.254: B5.4 131.831,54.468 134.889,57.526 B4.2
NetB5_2: B5.2 B7.4 | length 6.8
  Top Layer w0.254: B7.4 125.354,50.531 127.675,52.852 127.675,53.801 128.923,55.049 129.437,55.049 B5.2
NetB7_2: B7.2 B8.4 | length 4.9
  Top Layer w0.254: B8.4 120.02,53.198 120.093,53.125 120.093,52.9 120.396,52.597 120.396,51.33 120.545,51.181 B7.2
NetB100_1: B100.1 U100.34 | length 39.3
  Top Layer w0.254: U100.34@104.8,78.077 105.198,78.077 105.537,77.738 105.537,76.857 105.957,76.437 v1(106.086,76.437) ; v1@106.14,76.453 106.302,76.453 v1@106.302,76.614 ; v1(121.539,91.948) 121.602,92.011 121.602,93.662 B100.1 ; v1(124.968,80.899) 124.968,84.814 125.647,85.493 v1(125.647,89.408)
  Bottom Layer w0.254: v1(106.086,76.437) 106.146,76.497 106.89,76.497 107.864,77.47 115.824,77.47 117.348,78.994 122.007,78.994 122.515,79.502 123.571,79.502 v1(124.968,80.899) ; v1(121.539,91.948) 124.079,89.408 v1(125.647,89.408)
NetB100_3: B100.3 R101.2 U100.36 | length 34.1
  Top Layer w0.254: U100.36@104.8,79.077 v1(106.299,79.077) ; v1(122.763,81.407) 122.763,86.679 123.801,87.716 123.801,93.253 ; B100.3 122.966,93.326 123.039,93.253 123.801,93.253 ; R101.2 123.801,93.253
  Bottom Layer w0.254: v1(106.299,79.077) 113.327,79.077 114.387,80.137 121.713,80.137 122.181,80.605 122.181,80.825 v1(122.763,81.407)
NetB100_4: B100.4 U100.35 | length 38.1
  Top Layer w0.254: U100.35@104.8,78.577 105.319,78.577 106.045,77.851 v1(106.299,77.851) ; B100.4 123.026,95.566 123.398,95.566 126.453,92.512 126.453,83.942 126.238,83.727 v1(126.238,83.566)
  Bottom Layer w0.254: v1(106.299,77.851) 106.68,78.232 109.347,78.232 109.601,77.978 115.102,77.978 116.626,79.502 121.797,79.502 122.305,80.01 122.682,80.01 v1(126.238,83.566)
NetB100_5: B100.5 R100.1 U100.10 | length 71.5
  Top Layer w0.254: v1(89.9,76.975) 89.021,76.975 87.319,78.677 87.319,81.654 84.709,84.264 84.709,86.531 86.78,88.602 112.997,88.602 116.514,92.119 116.514,92.329 115.78,93.063 115.78,97.616 116.353,98.189 119.441,98.189 120.014,98.762 121.77,98.762 122.068,98.464 122.068,98.161 R100.1 ; v1(95.504,75.565) 96.492,74.577 U100.10@98.4,74.577 ; R100.1@122.314,97.917 122.314,95.628 B100.5
  Bottom Layer w0.254: v1(89.9,76.975) 92.443,76.975 93.853,75.565 v1(95.504,75.565)
NetB101_2: B101.2 R102.2 U100.13 | length 8
  Top Layer w0.254: R102.2 92.696,73.166 94.615,73.166 94.622,73.159 B101.2 96.425,73.127 97.795,73.127 97.901,73.021 98.705,73.021 98.811,73.127 U100.13@98.85,73.127
NetB102_3: B102.3 R106.2 U100.11 | length 51.2
  Top Layer w0.254: U100.11@98.4,74.095 98.239,74.095 94.002,74.096 93.853,74.244 93.853,77.507 95.472,79.126 95.714,79.126 97.254,80.666 97.938,80.666 103.522,86.25 v1(107.85,86.25) ; v1(117.348,85.344) 116.542,84.538 116.542,84.328 116.586,84.284 116.586,82.953 116.862,82.677 119.106,82.677 120.65,84.221 120.65,88.587 120.694,88.631 120.694,89.742 120.081,90.355 R106.2
  Bottom Layer w0.254: v1(107.85,86.25) 115.027,86.25 116.108,85.17 117.174,85.17 v1(117.348,85.344)
NetB102_4: B102.4 J301.3 J302.3 R105.2 R600.2 | length 107.3
  Top Layer w0.254: J302.3 82.483,57.166 81.094,58.555 81.094,81.244 83.693,83.843 ; J301.3 86.246,71.644 87.928,73.326 87.928,77.066 85.598,79.396 85.598,80.308 84.201,81.705 84.201,83.335 83.693,83.843 ; R600.2 111.689,84.339 112.507,85.157 114.243,85.157 v1(115.25,84.15) ; v1(114.046,91.44) 112.859,90.253 102.35,90.253 101.855,89.758 89.925,89.758 89.513,90.17 86.741,90.17 84.201,87.63 84.201,87.459 83.693,86.951 83.693,83.843 ; v1(117.7,84.075) 117.814,83.961 118.485,83.961 118.753,83.693 119.263,83.693 120.15,84.58 B102.4 ; R105.2 118.745,88.646 119.38,88.011 ; v1(119.507,89.408) 119.417,89.318 119.417,88.602 119.38,88.565 119.38,88.011 ; B102.4@120.142,85.512 120.142,87.249 119.38,88.011
  Bottom Layer w0.254: v1(114.046,91.44) 115.697,91.44 117.856,89.281 118.48,89.281 118.607,89.408 v1(119.507,89.408) ; v1(115.25,84.15) 115.289,84.189 116.056,84.189 116.17,84.075 v1(117.7,84.075)
NetB102_5: B102.5 J301.4 J302.4 R104.2 R601.2 | length 90.1
  Top Layer w0.254: J302.4 84.883,55.166 86.868,57.151 86.868,64.77 88.563,66.465 88.563,69.64 88.436,69.767 88.436,73.116 ; J301.4 84.883,69.644 86.375,71.136 86.456,71.136 88.436,73.116 ; R601.2 108.585,84.836 110.617,86.868 ; v1(107.8,89.55) 107.639,89.55 107.199,89.11 86.57,89.11 84.201,86.741 84.201,84.053 86.106,82.148 86.106,79.389 88.436,77.059 88.436,73.116 ; v1(107.825,87.625) 109.86,87.625 110.617,86.868 ; v1(113.538,87.122) 113.344,86.928 112.941,86.928 112.881,86.868 110.617,86.868 ; v1(118.433,87.204) 118.284,87.055 117.408,87.055 R104.2 117.689,86.487 118.07,86.106 119.056,86.106 B102.5
  Bottom Layer w0.254: v1(107.8,89.55) 107.812,89.538 107.812,87.637 v1(107.825,87.625) ; v1(113.538,87.122) 114.173,87.757 117.777,87.757 118.33,87.204 v1(118.433,87.204)
NetB102_8: B102.8 B102.10 R103.2 | length 14.1
  Top Layer w0.254: B102.8@120.658,81.112 120.658,78.097 121.296,77.459 121.296,76.581 121.75,76.581 123.571,76.581 124.079,77.089 124.079,79.607 123.93,79.756 121.799,79.756 121.65,79.905 B102.10 B102.10@121.627,81.089
NetB103_1: B103.1 L100.2 | length 5.8
  Top Layer w0.254: B103.1 94.762,85.725 L100.2
NetB400_4: B400.4 D400.2 Q400.3 | length 10.7
  Top Layer w0.254: B400.4@106.497,58.11 105.374,59.233 105.119,59.233 104.97,59.382 Q400.3 105.12,64.836 105.393,65.109 105.393,65.129 105.542,65.278 107.23,65.278 107.442,65.066 D400.2
NetC101_1: C101.1 C103.1 U100.2 | length 10.3
  Top Layer w0.254: v1(94.449,79.541) 94.919,80.01 95.88,80.01 96.855,80.985 96.855,81.224 97.221,81.59 97.623,81.59 C101.1 ; v1(96.975,78.232) 97.25,78.232 97.595,78.577 U100.2@98.4,78.577
  Bottom Layer w0.254: v1(94.449,79.541) 94.488,79.502 95.504,79.502 96.774,78.232 v1(96.975,78.232)
NetC101_2: C101.2 C104.1 L100.1 | length 11.6
  Top Layer w0.254: C104.1 93.355,81.534 95.387,83.566 C101.2 99.441,83.566 101.058,85.183 101.058,85.65 L100.1
NetC200_2: C200.2 U200.16 | length 17.6
  Top Layer w0.254: U200.16 110.006,76.828 110.155,76.977 116.404,76.977 117.057,76.324 117.776,76.324 118.255,75.845 118.522,75.845 119.654,74.713 119.654,73.871 117.475,71.692 C200.2
NetD401_1: U100.25
NetD401_2: R401.2
NetDARR200_1: D200.1 R200.2 | length 2.6
  Top Layer w0.254: D200.1 R200.2
NetJ300_5: R101.1 U100.38 | length 31.1
  Top Layer w0.254: U100.38 103.85,80.156 104.565,80.871 105.396,80.871 v1(106.225,81.7) ; v1(123.95,83.725) 123.95,87.154 124.155,87.359 124.155,90.627 R101.1
  Bottom Layer w0.254: v1(106.225,81.7) 113.025,81.7 114.125,80.6 117.75,80.6 120.875,83.725 v1(123.95,83.725)
NetQ400_1: Q400.1 R400.2 | length 3.7
  Top Layer w0.254: R400.2 102.743,65.913 Q400.1
NetR200_1: R200.1 R201.2 U200.8 | length 8.1
  Top Layer w0.254: U200.8 114.602,73.796 ; R200.1 114.066,71.08 114.484,71.498 114.868,71.498 115.463,72.093 115.463,72.935 114.602,73.796 ; R201.2 114.602,73.952 114.602,73.796
NetR202_1: R202.1 U200.9 | length 3.9
  Top Layer w0.254: U200.9@112.087,74.352 U200.9 112.157,74.296 112.255,74.394 113.013,74.394 114.435,75.816 R202.1
NetR400_1: R400.1 U100.21 | length 2.8
  Top Layer w0.254: R400.1 102.85,70.465 U100.21@102.85,73.127
NetR600_1: R600.1 U100.39 | length 10.1
  Top Layer w0.254: U100.39@103.35,79.527 103.35,80.49 104.648,81.788 v1(104.687,81.788) ; v1(108.331,83.642) 108.606,83.642 108.937,83.312 110.109,83.312 R600.1
  Bottom Layer w0.254: v1(104.687,81.788) 104.687,81.949 105.156,82.418 105.156,83.494 105.305,83.642 v1(108.331,83.642)
NetR601_1: R601.1 U100.42 | length 8.5
  Top Layer w0.254: U100.42@101.85,79.527 101.834,79.543 101.834,82.951 103.719,84.836 R601.1
NetSW400_2: SW400.2 U100.20 | length 18.4
  Top Layer w0.254: SW400.2 95.654,60.983 97.199,62.528 100.501,62.528 101.527,63.554 101.527,71.359 102.342,72.175 U100.20@102.342,73.127
NetSW401_2: SW401.2 U100.17 | length 17.9
  Top Layer w0.254: SW401.2 92.143,65.75 98.325,65.75 100.85,68.275 U100.17@100.85,73.127
NetU100_40: U100.40 U200.20 | length 16.6
  Top Layer w0.254: U100.40@102.85,79.527 102.85,81.006 103.505,81.661 v1(103.505,81.788) ; v1(104.1,83.575) 104.197,83.575 104.547,83.225 107.275,83.225 107.825,82.675 107.825,75.566 108.095,75.296 U200.20
  Bottom Layer w0.254: v1(103.505,81.788) 103.468,81.825 103.468,82.887 104.1,83.519 v1(104.1,83.575)
NetU100_41: U100.41 U200.21 | length 15.9
  Top Layer w0.254: U100.41 102.35,81.555 103.595,82.8 106.825,82.8 107.285,82.34 107.285,75.605 108.076,74.814 108.463,74.814 U200.21
"NoT V_BT": B6.2 B8.2 | length 13.1
  Top Layer w0.254: B6.2 113.533,60.633 112.125,59.225 112.125,57.475 115.752,53.848 B8.2
"NoT V_USB": B3.1 B6.6 B8.1 | length 7.4
  Top Layer w0.254: B6.6 115.814,57.989 116.665,57.989 117.695,56.959 B8.1 ; v1(122.625,55.65) 122.786,55.65 123.098,55.338 B3.1
PG: B1.4 R3.1 | length 20.9
  Top Layer w0.254: B1.4@91.574,95.771 90.572,95.771 90.556,95.755 89.824,95.755 88.186,94.118 88.186,93.678 88.8,93.064 88.8,92.291 89.905,91.186 90.678,91.186 91.427,90.437 98.97,90.437 R3.1
SW: B1.9 L1.1 | length 5.7
  Top Layer w0.254: B1.9@95.974,96.787 L1.1
V_BT: B3.2 B6.1 C2.2 C3.1 D2.2 L1.2 R3.2 R4.2 R6.2 | length 33.2
  Top Layer w0.254: R6.2 91.25,92.723 91.885,92.088 C2.2 94.282,93.231 v1(94.282,93.358) ; R4.2@99.235,97.803 101.791,97.803 102.385,97.209 102.385,96.97 L1.2 102.616,96.739 R3.2@102.616,93.183 ; v1(101.521,90.564) 102.537,91.58 R3.2 R3.2@102.616,93.183 ; C3.1 103.426,93.993 R3.2@102.616,93.183 ; D2.2 111.714,95.475 112.014,95.175 v1(112.175,95.175) ; B6.1 115.77,61.308 115.697,61.381 115.697,62.611 115.888,62.802 116.215,62.802 116.689,63.275 v1(116.85,63.275) ; v1(124.333,53.594) 124.5,53.594 125.661,54.755 125.661,55.269 B3.2
  Bottom Layer w0.254: v1(94.282,93.358) 94.557,93.358 94.938,92.977 98.981,92.977 101.394,90.564 v1(101.521,90.564)
V_BT_Source: B1.1 B1.8 C1.2 P501.1 pad.3 R5.2 | length 24.2
  Top Layer w0.254: P501.1 85.938,94.247 86.573,93.612 pad.3 86.698,93.831 86.698,94.755 85.738,95.715 85.738,96.296 C1.2 85.81,96.589 85.81,96.951 v1(86.916,98.057) ; v1(89.71,98.013) 89.71,97.914 90.345,97.279 B1.1 94.044,97.279 94.544,96.779 ; B1.8 95.044,96.279 94.544,96.779 ; R5.2 95.425,93.866 94.544,94.747 94.544,96.779
  Bottom Layer w0.254: v1(86.916,98.057) 86.938,98.035 89.688,98.035 v1(89.71,98.013)
V_HT: B7.1 C6.2 D3.2 L2.2 R9.2 | length 19.2
  Top Layer w0.254: L2.2 80.01,84.582 80.391,84.201 82.528,84.201 82.677,84.35 82.677,88.123 82.21,88.59 81.971,88.59 C6.2 ; R9.2 80.275,88.773 C6.2 ; v1(80.8,90.525) 80.914,90.411 81.493,90.411 81.788,90.116 C6.2 ; D3.2 110.088,92.912 112.388,92.912 v1(112.425,92.875) ; v1(121.65,53.225) 121.536,53.111 121.536,52.442 121.35,52.256 121.35,52.027 121.688,51.689 122.081,51.689 122.223,51.831 B7.1
V_HT_Source: B2.4 B2.5 C5.1 P500.1 pad.2 | length 11.1
  Top Layer w0.254: C5.1@71.271,86.669 71.658,87.056 ; B2.5 73.679,86.254 73.044,86.254 72.241,87.056 ; B2.4 72.241,87.056 ; P500.1 73.049,91.186 71.628,89.765 pad.2 71.96,87.52 71.96,87.358 71.658,87.056 ; 71.658,87.056 72.241,87.056
V_USB: B4.1 B6.5 D1.2 J200.A4 J200.A9 J200.B4 J200.B9 | length 13.8
  Top Layer w0.254: D1.2 110.241,98.234 112.078,98.234 v1(112.141,98.298) ; v1(113.95,58.7) 113.959,58.691 115.762,58.691 B6.5 ; J200.A4 125.428,66.963 126.093,67.628 126.093,70.655 125.611,71.137 125.463,71.137 J200.B4 J200.A9 ; v1(132.675,57.55) 132.675,57.711 133.148,58.185 133.148,58.472 133.477,58.801 B4.1
Valim: B3.5 B4.5 B5.5 B6.14 B7.5 B8.5 D1.1 D2.1 D3.1 | length 32.9
  Top Layer w0.254: D2.1 107.9,95.425 107.9,93 D3.1 ; D2.1@107.92,95.475 108.023,95.578 108.023,95.648 108.077,95.702 D1.1 ; B6.14 B6.14@121.671,61.258 ; B3.5 125.08,58.7 122.541,61.239 121.69,61.239 B6.14@121.671,61.258 ; B7.5 125.129,52.412 124.753,52.788 123.93,52.788 122.543,54.175 122.05,54.175 121.727,54.498 B8.5 119.795,60.283 120.751,61.239 121.651,61.239 B6.14@121.671,61.258 ; B5.5 131.606,59.47 133.037,60.901 B4.5
VIN_MCU: B4.4 B100.6 B102.6 B102.9 B400.1 C100.1 C102.2 D400.1 J301.2 J302.2 R100.2 R102.1 R103.1 R104.1 R105.1 R106.1 U100.1 U100.3 U100.4 U100.37 U100.46 | length 110.8
  Top Layer w0.254: J302.2 82.483,59.166 81.602,60.047 81.602,72.763 82.483,73.644 J301.2 83.699,73.66 86.624,73.66 86.939,73.975 v1(87.1,73.975) ; R102.1 91.44,78.579 91.8,78.939 v1(91.8,79.1) ; U100.4@98.4,77.577 97.698,77.577 ; U100.3@98.4,78.077 98.382,78.059 98.18,78.059 97.698,77.577 ; U100.1@98.4,79.077 98.299,79.077 98.128,79.248 96.555,79.248 ; B400.1@99.426,58.11 101.311,59.995 101.311,61.811 v1(101.375,61.875) ; U100.46@99.85,79.527 99.85,80.009 99.701,80.158 97.465,80.158 96.555,79.248 ; U100.37@104.35,79.527 104.368,79.545 104.368,79.646 104.561,79.839 104.561,80.093 104.71,80.242 106.247,80.242 v1(106.332,80.327) ; D400.1 109.474,62.517 109.948,62.043 v1(110.109,62.043) ; v1@115.05,79.175 v1(114.975,79.1) 115.95,79.1 v1(117.75,77.3) 118.425,76.625 R103.1 ; R105.1 116.742,88.733 116.742,90.453 ; C100.1 119.253,97.282 ; B102.6 119.564,81.026 116.126,81.026 C102.2 115.929,81.963 116.078,82.112 116.078,84.074 115.951,84.201 115.951,84.916 115.94,84.927 R104.1 115.94,89.651 116.742,90.453 ; B102.9 121.15,79.225 122.075,78.3 v1(122.775,78.3) ; 121.56,98.254 121.56,98.065 R100.2 ; B100.6 121.666,97.474 121.656,97.484 121.656,97.673 R100.2 ; B4.4 135.539,61.126 135.612,61.199 137.013,61.199 137.289,61.475 v1(137.45,61.475) ; 96.555,79.248 95.925,78.618 95.682,78.618 95.474,78.41 95.474,78.175 94.869,77.569 v1(94.869,77.343) 94.996,77.216 97.337,77.216 97.698,77.577 ; 116.742,90.453 117.544,91.255 R106.1 116.597,92.964 116.597,97.271 v1(116.586,97.282) 119.253,97.282 ; 119.253,97.282 119.888,97.917 R100.2
  Bottom Layer w0.254: v1@91.691,78.991 v1(91.8,79.1) ; v1(101.375,61.875) 102.352,61.875 102.529,61.698 109.602,61.698 109.948,62.043 v1(110.109,62.043) ; v1(117.75,77.3) 118.75,78.3 v1(122.775,78.3)
pads on no net: B6.3 B6.4 B6.8 B6.9 B6.10 B6.11 B6.12 B6.13 J200.A5 J200.A8 J200.B5 J200.B6 J200.B7 J200.B8 U100.5 U100.6 U100.7 U100.8 U100.9 U100.12 U100.14 U100.15 U100.16 U100.18 U100.19 U100.22 U100.23 U100.24 U100.26 U100.27 U100.28 U100.29 U100.30 U100.31 U100.32 U100.33 U100.43 U100.44 U100.45 U100.47 U100.48 U200.1 U200.10 U200.11 U200.12 U200.13 U200.14 U200.15 U200.17 U200.18 U200.19 U200.22 U200.23 U200.24 U200.25
copper on no net: | length 240
  Top Layer w0.254: 69.954,49.441 139.954,49.441 139.954,99.441 69.954,99.441 69.954,49.441
  other v2: 109.706,73.996 110.806,73.996 109.706,75.096 110.806,75.096

## Polygon pours and split planes (outlines as drawn)
VIN_MCU on Layer 2 "VIN_MCU_L02_P002" (solid, pour order 2): 70.575,98.8 71.216,99.441 139.375,99.441 139.375,51.4 138.25,50.275 70.65,50.275 70.65,98.8
GND on Layer 2 "GND_L02_P000" (solid, pour order 0): 70.35,99.075 70.716,99.441 139.6,99.441 139.6,49.9 139.675,49.825 139.6,49.75 70.425,49.75 70.425,99.225
V_USB on Top Layer "V_USB_L01_P004" (solid, pour order 4): 70.6,98.85 70.96,99.21 139.073,99.21 139.073,50.448 138.973,50.348 70.961,50.348 70.961,98.669 70.421,99.21
VIN_MCU on Top Layer "VIN_MCU_L01_P003" (solid, pour order 3): 70.185,98.974 70.421,99.21 139.073,99.21 139.073,50.448 138.973,50.348 70.185,50.348
GND on Top Layer "GND_L01_P001" (solid, pour order 1): 70.073,99.123 70.348,99.398 139.073,99.398 139.073,50.448 138.973,50.348 71.073,50.348 70.073,98.498 70.273,99.348
V_USB on Bottom Layer "V_USB_L04_P005" (solid, pour order 5): 70.421,99.21 70.61,99.398 139.954,99.398 139.954,51.329 138.066,49.441 70.348,49.441 70.348,99.398

## Other copper
Bottom Layer:
  text "Groupe 4" at 71.225,97.2 h1.5

## Text inside footprints (layer, text, board x,y; h text height)
J200: Mechanical 13 "PCB EDGE" at 129.967,74.403 h0.81 r90
Q400: Mechanical 9 "SOT-23" at 103.67,66.252 h0.5 r270